# Altium PCB EC_meter_v2.PcbDoc
Units mm, origin at the board's own origin, x right, y up, seen from the top; angles counter-clockwise.
Board outline 61.09 x 32.64 mm, 2 copper layers (Top Layer, Bottom Layer); 34 components, 15 nets, 95 pads, 36 vias.
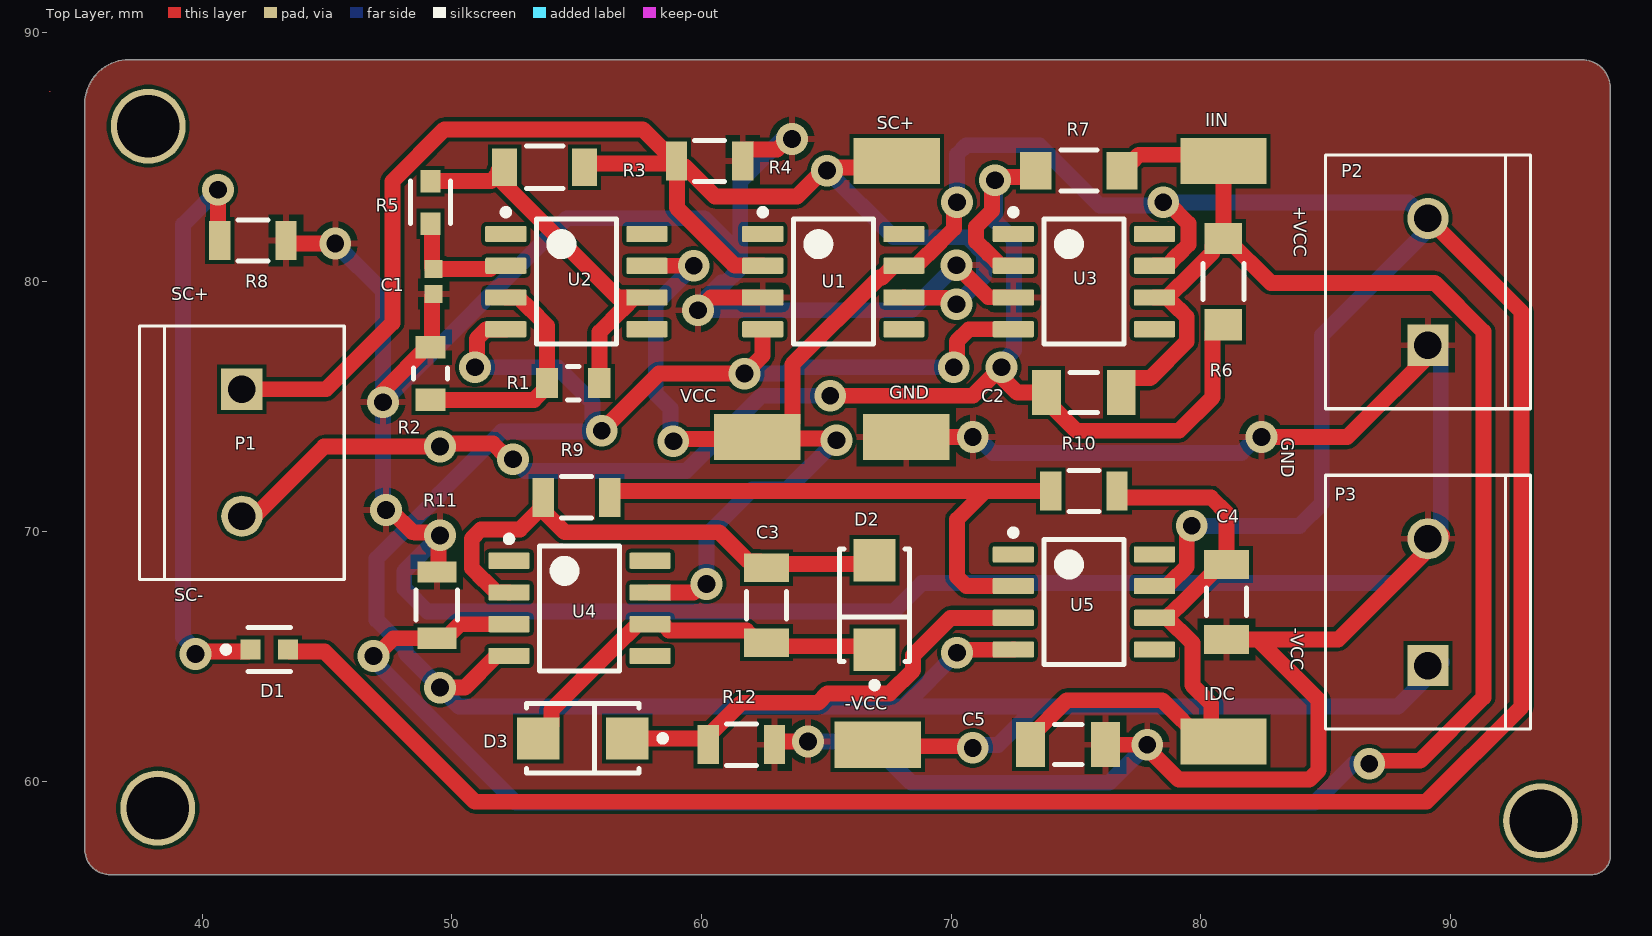
[diagram p0: Top Layer view]
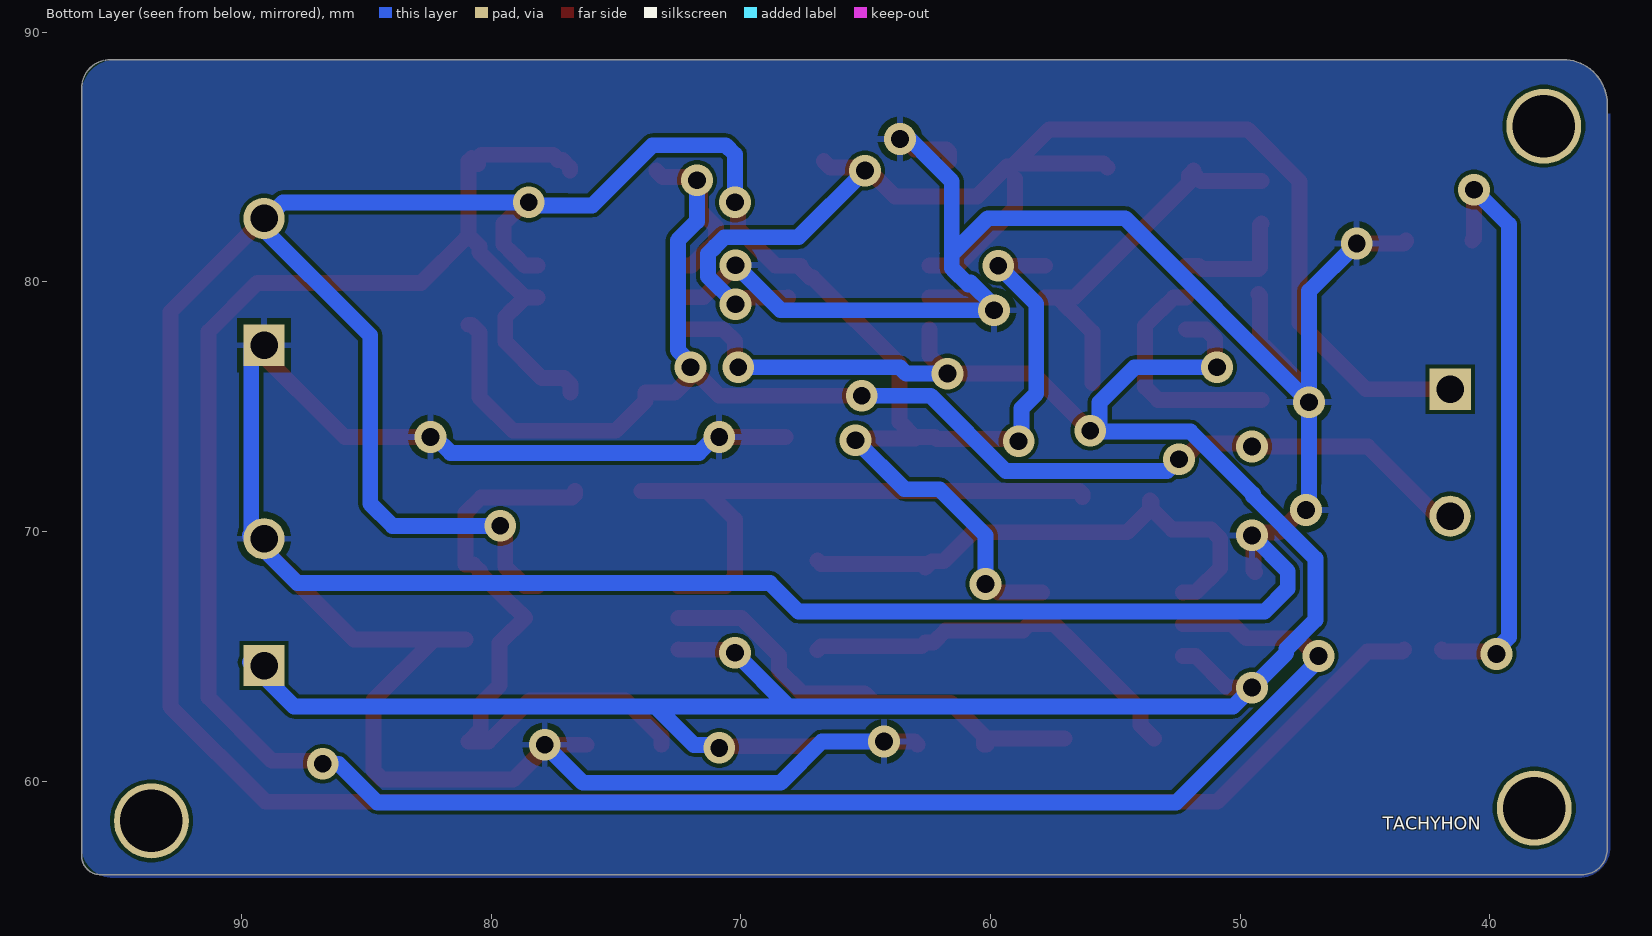
[diagram p1: Bottom Layer view, seen from below]
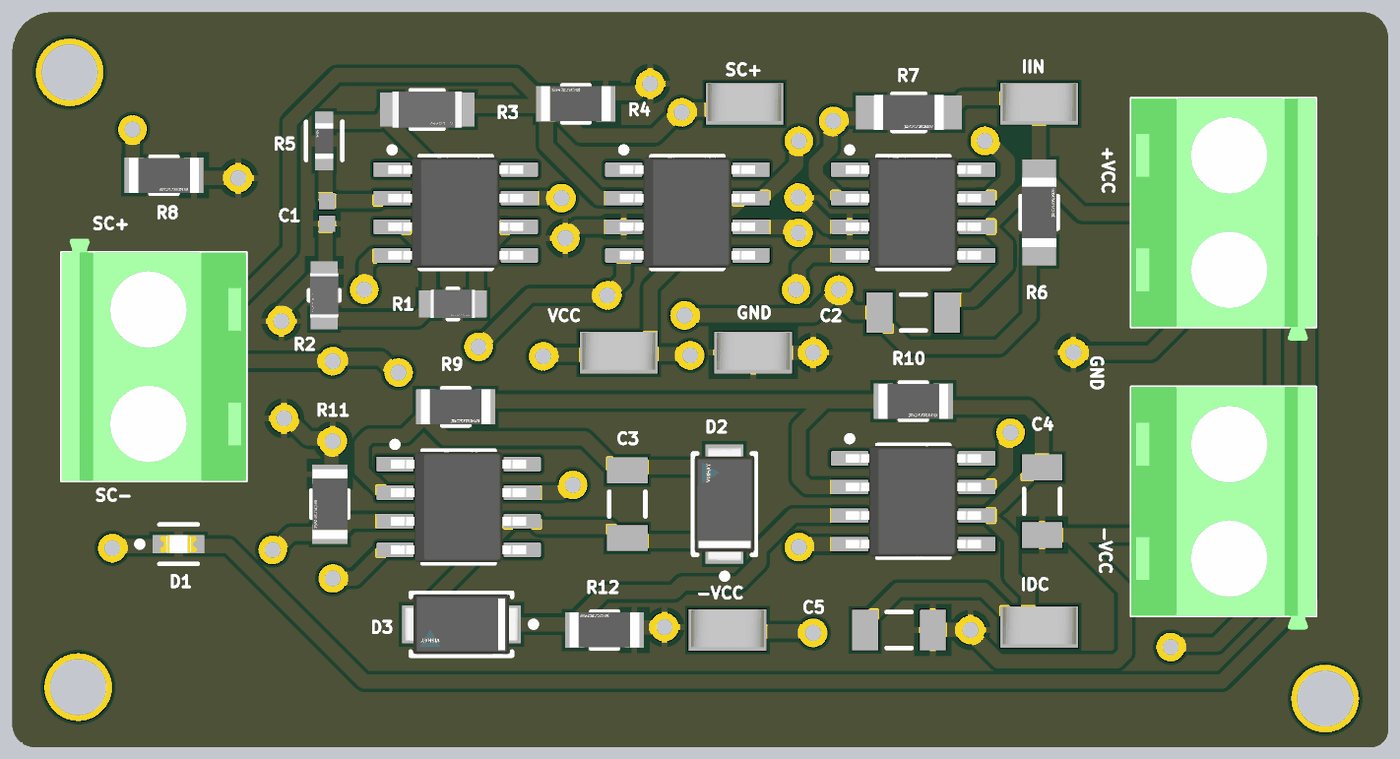
[diagram p2: 3D render of the assembled board from above, using the file's embedded part models]

## Layer stack, top to bottom
Top Solder: solder mask 0.0102, Solder Resist, Dk 3.5
Top Layer: signal copper 0.0356
Dielectric 1: dielectric 0.32, FR-4, Dk 4.8
Bottom Layer: signal copper 0.0356
Bottom Solder: solder mask 0.0102, Solder Resist, Dk 3.5

## Board outline
95.25,88.9 cw(c95.25,87.757) 96.393,87.757 96.393,57.023 cw(c95.631,57.023) 95.631,56.261 36.322,56.261 cw(c36.322,57.277) 35.306,57.277 35.306,87.122 cw(c37.084,87.122) 37.084,88.9

## Design rules (kind name [scope] priority, off if disabled: settings)
AssemblyTestPointUsage [All] p1: isadvanced=TRUE
AssemblyTestpoint [All] p1: isadvanced=TRUE testpointundercomponent=TRUE minsize=1.016 maxsize=2.54 preferedsize=1.524 minholesize=0 maxholesize=1.016 preferedholesize=0.813 testpointgrid=0.025 usegrid=TRUE gridtolerance=0 allowsidetop=TRUE allowsidebottom=TRUE
Clearance Clearnace [All] p1 off: isadvanced=TRUE gap=0.152 ignorepadtopadclearanceinfootprint=FALSE
Clearance Clearance_1 [OnMid vs OnMid] p2: gap=0.152 ignorepadtopadclearanceinfootprint=FALSE sourcerule=40 cellrowname=All cellrowtype=0 cellcolname=All cellcoltype=0 innerlayers=TRUE
Clearance Clearance_2 [(ExistsOnLayer('Top Layer') Or ExistsOnLayer('Bottom Layer')) vs (ExistsOnLayer('Top Layer') Or ExistsOnLayer('Bottom Layer'))] p3: gap=0.152 ignorepadtopadclearanceinfootprint=FALSE sourcerule=40 cellrowname=All cellrowtype=0 cellcolname=All cellcoltype=0 outerlayers=TRUE
Clearance [All] p4: gap=0.254 ignorepadtopadclearanceinfootprint=FALSE ismatrix=TRUE
ComponentClearance [All] p1: isadvanced=TRUE gap=0.254 collisioncheckmode=3 verticalgap=0.254 showdistances=FALSE
FabricationTestPointUsage [All] p1: isadvanced=TRUE valid=0 allowmultiple=FALSE
FabricationTestpoint [All] p1: isadvanced=TRUE side=3 testpointundercomponent=TRUE minsize=1.016 maxsize=2.54 preferedsize=1.524 minholesize=0 maxholesize=1.016 preferedholesize=0.813 testpointgrid=0.025 allowsidetop=TRUE allowsidebottom=TRUE usegrid=TRUE gridtolerance=0
FanoutControl Fanout_BGA [IsBGA] p1: isadvanced=TRUE bgadir=Out bgaviamode=Centered fanoutstyle=Auto fanoutdirection=Alternating viagrid=0.025 // Fanout_BGA (Default Rule)
FanoutControl Fanout_LCC [IsLCC] p2: isadvanced=TRUE bgadir=Out bgaviamode=Centered fanoutstyle=Auto fanoutdirection=Alternating viagrid=0.025 // Fanout_LCC (Default Rule)
FanoutControl Fanout_SOIC [IsSOIC] p3: isadvanced=TRUE bgadir=Out bgaviamode=Centered fanoutstyle=Auto fanoutdirection=Alternating viagrid=0.025 // Fanout_SOIC (Default Rule)
FanoutControl Fanout_Small [(CompPinCount < 5)] p4: isadvanced=TRUE bgadir=Out bgaviamode=Centered fanoutstyle=Auto fanoutdirection=OutThenIn viagrid=0.025 // Fanout_Small (Default Rule)
FanoutControl Fanout_Default [All] p5: isadvanced=TRUE bgadir=Out bgaviamode=Centered fanoutstyle=Auto fanoutdirection=Alternating viagrid=0.025 // Fanout_Default (Default Rule)
Height [All] p1: isadvanced=TRUE minheight=0 maxheight=25.4 prefheight=12.7
HoleSize [All] p1: isadvanced=TRUE absolutevalues=TRUE maxlimit=2.54 minlimit=0.025 maxpercent=80.000 minpercent=20.000
HoleToHoleClearance [All] p1: isadvanced=TRUE gap=0.254 allowstackedmicrovias=TRUE
LayerPairs [All] p1: isadvanced=TRUE enforce=TRUE
MinimumAnnularRing MinimumAnnularRing_1 [All] p1: isadvanced=TRUE minimumring=0.152
MinimumSolderMaskSliver [All] p1: isadvanced=TRUE minsoldermaskwidth=0.152
NetAntennae [All] p1: isadvanced=TRUE netantennaetolerance=0
PasteMaskExpansion [All] p1: isadvanced=TRUE expansion=0
PlaneClearance [All] p1: isadvanced=TRUE clearance=0.508
PlaneConnect [All] p1: isadvanced=TRUE planeconnectstyle=Relief reliefexpansion=0.508 reliefentries=4 reliefconductorwidth=0.254 reliefairgap=0.254
PolygonConnect [All] p1: connectstyle=Relief reliefconductorwidth=0.254 reliefentries=4 polygonreliefangle="90 Angle" airgapwidth=0.254
RoutingCorners [All] p1: isadvanced=TRUE cornerstyle=45-Degree minsetback=2.54 maxsetback=2.54
RoutingPriority [All] p1: isadvanced=TRUE routingpriority=0
RoutingVias [All] p1: holewidth=0.711 width=1.27 viastyle="Through Hole" minholewidth=0.711 minwidth=1.27 maxholewidth=0.711 maxwidth=1.27
ShortCircuit [All] p1: isadvanced=TRUE allowed=FALSE
SilkToSilkClearance [All] p1: isadvanced=TRUE silktosilkclearance=0.152
SilkToSolderMaskClearance [IsPad] p1: isadvanced=TRUE minsilkscreentomaskgap=0.152 clearancetoexposedcopper=TRUE
SolderMaskExpansion [All] p1: isadvanced=TRUE expansion=0.051 istentingtop=FALSE
SupplyNets "Schematic Supply Nets" [InNet('GND')] p1: isadvanced=TRUE voltage=0.000
UnRoutedNet [All] p1: isadvanced=TRUE
UnpouredPolygon [All] p1: isadvanced=TRUE
Width MaxMinWidth_1 [All] p1: isadvanced=TRUE maxlimit=5.08 minlimit=0.152 preferedwidth=0.254 minimp=50.000000 maximp=50.000000 favimp=50.000000
Width [All] p2 off: maxlimit=0.254 minlimit=0.254 preferedwidth=0.254
4 further rules are at their usual default settings.

## Classes and differential pairs
component class EC_meter_v2: -VCC C1 C2 C3 C4 C5 D2 D3 IDC IIN P1 P2 P3 R1 R2 R3 R4 R5 R6 R7 R9 R11 R12 SC+ U1 U2 U3 U4 U5 VCC

## Components (designator, comment, footprint, x,y, rotation, side; value= is the part's Value field where it differs from the comment)
-VCC "Test_Point" Test_point 67.183,61.341 r0 top (schematic designator *2)
C1 "CAP 10nF 16V 0402(1005)" CAPC0402(1005)60_M 49.276,80.01 r90 top value=10nF
C2 "CAP 1pF 100V 1206(3216)" CAPC1206(3216)170_N 75.311,75.565 r180 top value=1pF
C3 "CAP 1pF 100V 1206(3216)" CAPC1206(3216)170_N 62.611,67.056 r90 top value=1pF
C4 "CAP 1pF 100V 1206(3216)" CAPC1206(3216)170_N 81.026,67.183 r90 top value=1pF
C5 "CAP 1pF 100V 1206(3216)" CAPC1206(3216)170_N 74.676,61.468 r180 top value=1pF
D1 "LTST-C190KGKT" FP-LTST-C190KGKT-MFG 42.684,65.278 r0 top
D2 "S1M-E3/5AT" FP-95400-MFG 66.929,67.056 r90 top value=12pF
D3 "S1M-E3/5AT" FP-95400-MFG 55.245,61.722 r180 top value=12pF
GND "Test_Point" Test_point 68.326,73.66 r0 top (schematic designator *3)
IDC "Test_Point" Test_point 81.026,61.468 r0 top (schematic designator *6)
IIN "Test_Point" Test_point 81.026,84.709 r0 top (schematic designator *5)
P1 "TERMINAL_BLOCKS" "PCBComponent_1 - duplicate" 41.656,72.136 r270 top
P2 "TERMINAL_BLOCKS" "PCBComponent_1 - duplicate" 89.027,81.026 r90 top
P3 "TERMINAL_BLOCKS" "PCBComponent_1 - duplicate" 89.027,68.199 r90 top
R1 "AC0805FR-0710KL" FP-AC0805-MFG 54.864,75.946 r0 top value=10KΩ
R2 "AC0805FR-0710KL" FP-AC0805-MFG 49.149,76.327 r270 top value=10KΩ
R3 "AC1206FR-0724KL" FP-AC1206-MFG 53.721,84.582 r0 top value=24KΩ
R4 "CR1206-JW-102ELF" FP-CR1206-IPC_C 60.325,84.836 r180 top
R5 "RT0603BRD0730KL" FP-RT0603-0_55-MFG 49.149,83.185 r90 top
R6 "CR1206-FX-3300ELF" FP-CR1206-MFG 80.899,80.01 r90 top
R7 "CR1206-FX-3300ELF" FP-CR1206-MFG 75.11,84.455 r0 top
R8 "CR1206-JW-102ELF" FP-CR1206-IPC_C 42.037,81.661 r0 top
R9 "CR1206-JW-102ELF" FP-CR1206-IPC_C 54.991,71.374 r0 top
R10 "CR1206-JW-102ELF" FP-CR1206-IPC_C 75.311,71.628 r0 top
R11 "CR1206-JW-102ELF" FP-CR1206-IPC_C 49.403,67.056 r270 top
R12 "CR1206-JW-102ELF" FP-CR1206-IPC_C 61.595,61.468 r180 top
SC+ "Test_Point" Test_point 67.945,84.709 r0 top (schematic designator *1)
U1 "OPA343UA" D0008A_M 65.278,80.01 r0 top
U2 "OPA343UA" D0008A_M 54.991,80.01 r0 top
U3 "OPA343UA" D0008A_M 75.311,80.01 r0 top
U4 "OPA343UA" D0008A_M 55.118,66.929 r0 top
U5 "OPA343UA" D0008A_M 75.311,67.183 r0 top
VCC "Test_Point" Test_point 62.357,73.66 r0 top (schematic designator *4)

## Footprints (in the part's own frame and the unit in brackets; to place one, negate y for a bottom-side part, rotate by r counter-clockwise, add the part's x,y. Pads: shape width x height; smd on the part's side, far side on the other; paste and mask are expansions set on the pad)
CAPC0402(1005)60_M [mm] "Chip Capacitor, Body 1.0x0.5mm, Height 0.6mm, IPC Low Density"
  rect 0.72x0.72 smd: 1(-0.5,0) 2(0.5,0)
  body extent -0.55,-0.3 0.55,0.3, height 0.6
CAPC1206(3216)170_N [mm] "Chip Capacitor, Body 3.2x1.6mm, Height 1.7mm, IPC Medium Density"
  rect 1.15x1.8 smd: 1(-1.5,0) 2(1.5,0)
  silkscreen extent -0.55,-0.8 0.55,0.8, body extent -1.7,-0.9 1.7,0.9, height 1.7
D0008A_M [mm] "SOIC, 8-Leads, Body 5x4mm, Pitch 1.27mm, IPC Low Density"
  rrect15% 1.65x0.65 smd: 1(-2.825,1.905) 2(-2.825,0.635) 3(-2.825,-0.635) 4(-2.825,-1.905) 5(2.825,-1.905) 6(2.825,-0.635) 7(2.825,0.635) 8(2.825,1.905)
  silkscreen extent -2.95,-2.5 1.6,2.9, body extent -3,-2.45 3,2.45, height 1.63
FP-95400-MFG [mm]
  rect 1.7x1.68 smd paste+0 mask+0: 1(-1.79,0) 2(1.79,0)
  silkscreen extent -3.32,-1.4 2.25,1.4, body extent -2.74,-1.5 2.74,1.5, height 0.25
FP-AC0805-MFG [mm]
  rect 0.9x1.2 smd paste+0 mask+0: 1(-1.05,0) 2(1.05,0)
  silkscreen extent -0.23,-0.67 0.23,0.67, body extent -1.6,-0.77 1.6,0.77, height 0.25
FP-AC1206-MFG [mm]
  rect 1x1.5 smd paste+0 mask+0: 1(-1.6,0) 2(1.6,0)
  silkscreen extent -0.72,-0.85 0.72,0.85, body extent -2.2,-0.95 2.2,0.95, height 0.25
FP-CR1206-IPC_C [mil]
  rect 33.79x61.5 smd paste+0 mask+0: 1(-52.24,0) 2(52.24,0)
  silkscreen extent -24,-32 24,32, body extent -73,-36 73,36, height 10
FP-CR1206-MFG [mm]
  rect 1.25x1.5 smd paste+0 mask+0: 1(-1.725,0) 2(1.725,0)
  silkscreen extent -0.72,-0.82 0.72,0.82, body extent -2.45,-0.92 2.45,0.92, height 0.25
FP-LTST-C190KGKT-MFG [mm]
  rect 0.8x0.8 smd paste+0 mask+0: 1(-0.75,0) 2(0.75,0)
  silkscreen extent -1.85,-0.87 0.85,0.87, body extent -1.25,-0.55 1.25,0.55, height 0.25
FP-RT0603-0_55-MFG [mm]
  rect 0.9x0.8 smd paste+0 mask+0: 1(-0.85,0) 2(0.85,0)
  silkscreen extent -0.85,-0.81 0.86,0.8, body extent -1.4,-0.55 1.4,0.55, height 0.25
"PCBComponent_1 - duplicate" [mm]
  rect 1.65x1.65 / inner round 1.65 / far side rect 1.65x1.65 hole 1.1: 1(-3.563,-0.061)
  round 1.65 hole 1.1: 2(1.517,-0.061)
  silkscreen extent -6.1,-4.16 4.06,4.04, body extent -6.7,-4.16 4.06,4.04, height 10
Test_point [mm]
  rect 3.45x1.85 smd: 1(-0.127,0.127)
  body extent -1.75,-0.64 1.5,1.01, height 2.05

## Part data
C1: library part CMP-1034-01878-1, "CAP 10nF 16V -20% to +80% 0402 (1005 Metric) Thickness 0.6mm SMD", Case-EIA=0402, Case-Metric=1005, Rated Voltage="16 V", Tolerance="-20% to +80%", Max Thickness="0.6 mm", Technology=SMT
C2 C3 C4 C5: library part CMP-1037-00028-1, "CAP 1pF 100V ±0.25pF 1206 (3216 Metric) Thickness 1.7mm SMD", Case-EIA=1206, Case-Metric=3216, Rated Voltage="100 V", Tolerance=Â±0.25pF, Max Thickness="1.7 mm", Technology=SMT
D1: library part CMP-2000-05197-2, "LED GREEN CLEAR CHIP SMD", Case Code (Imperial)=0603, Case Code (Metric)=1608, Color=Green, Forward Current=30mA, Forward Voltage=2V, Lens Color=Colorless, Max Operating Temperature=85°C, Min Operating Temperature=-55°C, Package Quantity=1, Power Dissipation=75mW, Reverse Voltage=5V, Test Current=20mA, Case/Package=0603, Depth=0.8mm, Dominant Wavelength=571nm, Height=0.8mm, Illumination Color=Green, Lead Free="Lead Free", Length=1.6mm, Lens Style=Diffused, Lens Transparency=Clear, Luminous Intensity=35mcd, Mount="Surface Mount", Number of Elements=1, Number of LEDs=1, Number of Pins=2, Packaging="Tape and Reel", Power Rating=75mW, Radiation Hardening=No, Viewing Angle=130°, Wavelength=574nm, Width=0.8mm
D2 D3: library part CMP-02540-000018-1, "DIODE GEN PURP 1KV 1A DO214AC", Capacitance=12pF, Forward Current=1A, Manufacturer=Vishay, Max Junction Temp=+150°C, Max Repetitive Reverse Voltage=1000V, Max Surge Forward Current=30A, Package=95400, Peak Reverse Current=5uA, Temperature="-55°C to +150°C", Temperature Range Low=-55°C, Automotive=No, Category=Diode, ComponentLink2Description=Datasheet, ComponentLink2URL=http://www.vishay.com/docs/88711/s1.pdf, Device Class L1="Discrete Semiconductors", Device Class L2=Diodes, Device Class L3="Rectifier Diodes", Digikey Description="DIODE GEN PURP 1KV 1A DO214AC", Footprint Url=http://www.vishay.com/docs/95400/sma.pdf, Height=2.29mm, Lead Free=Yes, Manufacturer Part Number=S1M-E3/5AT, Mouser Description="Rectifiers 1.0 Amp 1000 Volt 30A IFSM @ 8.3ms", Octopart=https://octopart.com/s1m-e3%2F5at-vishay-42334588, RoHS=TRUE, Standoff Height=0mm, Temperature Range High=+150°C
R1 R2: library part CMP-2001-04480-2, "RES SMD 10K OHM 1% 1/8W 0805", Manufacturer=Yageo, Package=AC0805, Power Rating=1/8W, Resistance=10KΩ, Temperature="-55°C to +155°C", Temperature Range High=+155°C, Temperature Range Low=-55°C, Tolerance=0.01, Voltage Rating=150V, Automotive=Yes, Automotive Grade="Grade 0", Category=Res, ComponentLink2Description=Datasheet, ComponentLink2URL=http://www.yageo.com/documents/recent/PYu-AC_51_RoHS_L_6.pdf, Composition="Thick Film", Device Class L1="Passive Components", Device Class L2=Resistors, Device Class L3="Chip SMD Resistors", Digikey Description="RES SMD 10K OHM 1% 1/8W 0805", Footprint Url=http://www.yageo.com/exep/pages/download/literatures/PYu-R_Mount_10.pdf, Height=0.6mm, Ipc Land Pattern Name=RESC200125X50, Lead Free=Yes, Manufacturer Part Number=AC0805FR-0710KL, Mouser Description="Res Thick Film 0805 10K Ohm 1% 0.125W(1/8W) ±100ppm/C Epoxy Pad SMD Automotive T/R", Octopart=https://octopart.com/ac0805fr-0710kl-yageo-21711112, RoHS=TRUE, Series=AC
R3: library part CMP-03412-000204-1, "RES SMD 24K OHM 1% 1/4W 1206", Manufacturer=Yageo, Package=AC1206, Power Rating=0.25W, Resistance=24KΩ, Temperature="-55°C to +155°C", Temperature Range High=+155°C, Temperature Range Low=-55°C, Tolerance=0.01, Voltage Rating=200V, Automotive=Yes, Automotive Grade="Grade 0", Category=Res, ComponentLink2Description=Datasheet, ComponentLink2URL=http://www.yageo.com/NewPortal/yageodocoutput?fileName=/pdf/R-Chip/PYu-AC_51_RoHS_L_6.pdf, Composition="Thick Film", Device Class L1="Passive Components", Device Class L2=Resistors, Device Class L3="Chip SMD Resistors", Digikey Description="RES SMD 24K OHM 1% 1/4W 1206", Footprint Url=http://www.yageo.com/exep/pages/download/literatures/PYu-R_Mount_10.pdf, Height=0.65mm, Ipc Land Pattern Name=RESC310160X55, Lead Free=Yes, Manufacturer Part Number=AC1206FR-0724KL, Mouser Description="RES SMD 24K OHM 1% 1/4W 1206", Octopart=https://octopart.com/ac1206fr-0724kl-yageo-30511081, RoHS=TRUE, Series=AC
R4 R8 R9 R10 R11 R12: library part CMP-07231-001820-1, "Thick Film Chip Resistors 1206 1kΩ 0.25W 5% 200ppm/°C", Case Code (Imperial)=1206, Case Code (Metric)=3216, Max Operating Temperature=155°C, Min Operating Temperature=-55°C, Package Quantity=5000, Power Rating=250mW, Resistance=1kR, Temperature Coefficient=200ppm/°C, Tolerance=5%, Voltage Rating=200V, Case/Package=1206, Composition="Thick Film", Contact Plating=Tin, Depth=1.6mm, Height=0.6mm, Length=3.2mm, Military Standard=Not, Mount="Surface Mount", Number of Pins=2, Packaging="Tape and Reel", Radiation Hardening=No, REACH SVHC="No SVHC", Termination=SMD/SMT, Thickness=610um, Voltage Rating (DC)=200V, Width=1.6mm
R5: library part CMP-2000-04435-3, Case Code (Imperial)=0603, Case Code (Metric)=1608, Max Operating Temperature=125°C, Max Power Dissipation=100mW, Min Operating Temperature=-55°C, Resistance=30kΩ, Temperature Coefficient=25ppm/°C, Tolerance=0.1%, Voltage Rating=75V, Voltage Rating (DC)=50V, Case/Package=0603, Composition="Thin Film", Contact Plating=Tin, Depth=800µm, Features="Moisture Resistant", Height=550µm, Lead Free="Lead Free", Length=1.6mm, Military Standard=Not, NexarPartId=1243756, Number of Terminations=2, Power Rating=100mW, Radiation Hardening=No, RoHS=Compliant, Schedule B="8533210045, 8533210045", Termination=SMD/SMT, Weight=2.012816mg, Width=787.4µm
R6 R7: library part CMP-07231-003158-1, "Thick Film Chip Resistors 1206 330Ω 0.25W 1% 100ppm/°C", Case Code (Imperial)=1206, Case Code (Metric)=3216, Max Operating Temperature=155°C, Max Power Dissipation=250mW, Min Operating Temperature=-55°C, Package Quantity=5000, Resistance=330R, Temperature Coefficient=100ppm/°C, Tolerance=1%, Voltage Rating=200V, Case/Package=1206, Composition="Thick Film", Contact Plating=Tin, Depth=1.6mm, Height=0.6mm, Length=3.2mm, Military Standard=Not, Mount="Surface Mount", Number of Pins=2, Number of Terminations=2, Packaging="Tape and Reel", Power Rating=250mW, Radiation Hardening=No, REACH SVHC="No SVHC", Termination=SMD/SMT, Thickness=610um, Voltage Rating (DC)=200V, Width=1.6mm
U1 U2 U3 U4 U5: library part CMP-0272-00349-3, "Single-Supply, Rail-to-Rail Operational Amplifier MicroAmplifier(TM) Series, 2.5 to 5.5 V, -40 to 85 degC, 8-pin SOIC (D8), Green (RoHS & no Sb/Br)", Manufacturer="Texas Instruments", Rating=Catalog, Total Supply Voltage(Max)(+5V is 5, +/-5V is 10)=5.5, Total Supply Voltage(Min)(+5V is 5, +/-5V is 10)=2.5, CMRR(Min)(dB)=74, Code_JEDEC=MS-012, ComponentLink1Description="Manufacturer URL", ComponentLink1URL=http://www.ti.com/, ComponentLink2Description=Datasheet, ComponentLink2URL=http://www.ti.com/lit/ds/symlink/opa343.pdf, ComponentLink3Description="Package Specification", ComponentLink3URL=http://www.ti.com/litv/pdf/msoi002j, DatasheetVersion=SBOS090A, Eco-Plan="Green (RoHS & no Sb/Br)", GBW(Typ)(MHz)=5.5, IIB(Max)(pA)=10, Iq per channel(Max)(mA)=1.25, Mounting Technology="Surface Mount", Number of Channels=1, Offset Drift(Typ)(uV/C)=3, PackageDescription="8-Pin Plastic Small Outline, Body 4.9 x 3.9 mm, Pitch 1.27 mm", PackageReference=D0008A, PackageVersion="4040047-3/M, 06/2011", Packing=TUBE, PartNumber=OPA343UA, Slew Rate(Typ)(V/us)=6, Sub Family="High Output Current Amplifier (>=50mA), Low Input Bias Current Amp (<=10pA), Low Supply Voltage Amplifier (<=2.7V), Precision Amplifier", Vio (25C)(Max)(mV)=8

## Free pads (board coordinates)
  round 3 hole 2.5: 2(37.846,86.233) 4(93.599,58.42) 5(38.227,58.928)

## Via types
v1: diameter 1.27, hole 0.711, Top Layer to Bottom Layer, 36 vias

## Nets (pads, with @x,y where several pads share a name; then routed paths per layer and width w, separated by ;. In a path a pad name is that pad's centre, name@x,y a point inside that pad or via, vN(x,y) a via of type N, cw(c..) or ccw(c..) an arc to the next point about the centre after c; other vN are vias at no path point)
-VCC: -VCC.1 P3.1 U1.4 U2.4 U3.4 U4.4 U5.4 | length 104.1
  Top Layer w0.635: v1(49.53,63.754) 50.523,63.754 51.793,65.024 U4.4 ; v1(50.927,76.581) 51.005,76.659 51.005,77.726 51.377,78.097 52.158,78.097 U2.4 ; v1(56.007,74.041) 58.293,76.327 v1(61.722,76.327) 62.445,77.05 62.445,78.097 U1.4 ; -VCC.1 67.12,61.404 70.802,61.404 v1(70.866,61.341) ; v1(70.104,76.581) 70.226,76.703 70.226,77.622 70.708,78.105 U3.4 ; v1(70.231,65.151) 70.35,65.27 72.478,65.27 U5.4
  Bottom Layer w0.635: v1(50.927,76.581) 54.229,76.581 55.631,75.179 v1@55.631,74.003 ; v1(56.007,74.041) 55.969,74.003 v1@55.631,74.003 ; v1(61.722,76.327) 63.373,76.327 63.627,76.581 v1(70.104,76.581) ; v1(70.231,65.151) 68.072,62.992 ; v1(70.866,61.341) 70.988,61.463 71.877,61.463 73.406,62.992 ; P3.1@89.662,64.77 87.884,62.992 73.406,62.992 ; v1@55.631,74.003 51.993,74.003 49.492,71.501 49.492,71.424 46.99,68.922 46.99,66.46 48.156,65.293 48.156,65.128 50.292,62.992 68.072,62.992 ; 68.072,62.992 73.406,62.992
FB_OSC: C1.2 R5.1 U2.2 | length 4.8
  Top Layer w0.635: R5.1 49.212,82.271 49.212,80.574 C1.2 51.531,80.51 51.666,80.645 U2.2
GND: C1.1 C4.1 C5.1 GND.1 P2.1 P3.2 R2.1 R4.1 R8.2 R11.1 R12.1 U1.3 U3.3 | length 188
  Top Layer w0.635: R8.2 ccw(c43.491,81.661) 43.491,81.534 v1(45.339,81.534) ; v1(47.244,75.184) 47.244,75.622 49.063,77.441 49.212,77.441 49.212,79.447 C1.1 ; v1(47.371,70.866) 47.543,70.866 48.432,69.977 48.514,69.977 48.519,69.972 49.408,69.972 v1(49.53,69.85) 49.466,69.787 49.466,68.446 R11.1 ; v1(59.862,78.867) 60.37,79.375 U1.3 ; R4.1 61.652,85.188 61.764,85.3 63.03,85.3 63.455,85.725 v1(63.627,85.725) ; R12.1 62.922,61.483 63.034,61.595 v1(64.262,61.595) ; GND.1 v1(70.866,73.787) ; v1(70.206,80.67) 71.494,79.383 72.478,79.383 U3.3 ; C5.1 v1(77.851,61.468) 77.851,61.328 79.108,60.071 84.337,60.071 84.709,60.443 84.709,63.246 82.272,65.683 ; C4.1 82.272,65.683 ; v1(82.423,73.787) 85.852,73.787 P2.1@89.535,77.47 ; P3.2@89.662,69.85 85.495,65.683 82.272,65.683
  Bottom Layer w0.635: v1(45.339,81.534) 47.244,79.629 v1(47.244,75.184) ; v1(47.371,70.866) 47.249,70.988 47.249,71.9 47.244,71.905 v1(47.244,75.184) ; v1(49.53,69.85) 48.095,68.415 48.095,67.729 49.022,66.802 67.691,66.802 68.834,67.945 87.757,67.945 89.662,69.85 89.599,69.913 89.599,77.406 P2.1@89.535,77.47 ; 61.506,80.511 60.881,79.886 60.795,79.972 59.862,79.039 v1(59.862,78.867) 68.404,78.867 v1(70.206,80.67) ; 61.551,80.556 61.551,81.109 60.11,82.55 54.61,82.55 v1(47.244,75.184) ; 61.551,81.199 61.551,84.03 62.026,84.505 v1@63.5,85.979 ; v1(64.262,61.595) 66.755,61.595 68.406,59.944 76.327,59.944 v1(77.851,61.468) ; v1(70.866,73.787) 71.038,73.787 71.673,73.152 81.616,73.152 82.251,73.787 v1(82.423,73.787)
IDC: C4.2 C5.2 IDC.1 R10.2 U5.6 | length 25.5
  Top Layer w0.635: C5.2 73.176,61.793 74.629,63.246 78.448,63.246 80.099,61.595 IDC.1 80.409,62.085 80.409,63.101 79.656,63.854 79.656,65.544 79.127,66.073 79.111,66.073 78.636,66.548 79.093,67.005 79.108,67.005 80.443,68.34 80.443,68.425 80.701,68.683 C4.2 81.026,70.739 80.401,71.364 76.75,71.364 76.638,71.476 R10.2
IIN: C2.1 IIN.1 R6.2 R7.2 R11.2 U3.6 U4.3 | length 99
  Top Layer w0.635: v1(46.863,65.024) 46.964,65.024 47.669,65.729 49.755,65.729 50.32,66.294 U4.3 ; C2.1 76.811,75.89 77.068,76.147 77.964,76.147 79.431,77.614 79.431,78.596 79.108,78.918 79.093,78.918 78.636,79.375 U3.6 ; R7.2 76.835,84.58 77.143,84.888 77.312,84.888 77.514,85.09 80.391,85.09 IIN.1@80.772,84.709 ; U3.6@78.636,79.383 78.643,79.383 79.111,79.85 79.127,79.85 80.466,81.189 80.466,81.427 80.774,81.735 R6.2 ; IIN.1@80.518,84.709 80.772,84.963 IIN.1 R6.2 ; v1(86.741,60.706) 86.863,60.828 88.777,60.828 91.313,63.364 91.313,78.007 89.361,79.959 82.8,79.959 81.024,81.735 R6.2
  Bottom Layer w0.635: v1(46.863,65.024) 46.863,64.858 52.565,59.157 84.557,59.157 86.106,60.706 v1(86.741,60.706)
NetC3_1: C3.1 D2.1 D3.2 U4.6 | length 16.2
  Top Layer w0.635: D3.2 53.465,61.722 53.988,62.245 53.988,62.854 56.971,65.837 56.986,65.837 57.443,66.294 58.443,66.294 58.697,66.04 61.802,66.04 62.286,65.556 C3.1 62.756,65.411 66.784,65.411 D2.1
NetD1_1: D1.1 R8.1 | length 23.7
  Top Layer w0.635: v1(39.74,65.101) 39.835,65.195 41.851,65.195 D1.1 ; v1(40.64,83.693) 40.64,81.731 R8.1
  Bottom Layer w0.635: v1(39.74,65.101) 39.74,65.273 39.243,65.77 39.243,82.296 v1(40.64,83.693)
NetD3_1: D3.1 R12.2 U5.3 | length 18.2
  Top Layer w0.635: D3.1 60.156,61.722 R12.2@60.156,61.468 ; R12.2 60.268,61.82 61.598,63.15 64.67,63.15 65.042,63.522 67.539,63.522 68.473,64.455 68.473,65.044 69.977,66.548 U5.3
NetR1_2: R1.2 R3.1 R5.2 U2.6 | length 15.2
  Top Layer w0.635: R5.2 51.57,84.035 51.867,84.332 51.867,84.455 52.05,84.272 52.05,83.967 56.634,79.383 U2.6@57.316,79.383 ; R1.2 55.914,77.989 56.825,78.9 56.841,78.9 57.316,79.375 U2.6
NetR9_2: R9.2 R10.1 U5.2 | length 24.2
  Top Layer w0.635: R9.2 56.318,71.516 56.43,71.628 71.374,71.628 ; U5.2 70.612,67.818 70.231,68.199 70.231,70.485 71.374,71.628 ; R10.1 71.374,71.628
NON_I_U2: R1.1 R2.2 U2.3 | length 9.4
  Top Layer w0.635: R2.2 53.295,75.277 53.814,75.796 R1.1 53.814,78.243 53.138,78.918 53.123,78.918 52.666,79.375 U2.3
NON_I_U4: C3.2 D2.2 R9.1 U4.2 | length 21.4
  Top Layer w0.635: U4.2 52.285,67.572 51.785,67.572 51.318,68.039 51.302,68.039 50.8,68.541 50.8,69.717 51.172,70.089 52.731,70.089 53.552,70.91 53.552,71.192 53.607,71.247 53.607,70.895 54.525,69.977 60.706,69.977 61.87,68.813 62.353,68.813 62.538,68.628 C3.2 ; C3.2@62.611,68.701 66.784,68.701 D2.2
SC+: P1.1 R3.2 R4.2 SC+.1 U1.2 U1.6 | length 55.5
  Top Layer w0.635: P1.1@42.103,75.699 44.965,75.699 47.625,78.359 47.625,84.026 49.705,86.106 57.645,86.106 59.125,84.626 59.335,84.626 60.547,83.414 63.82,83.414 64.861,84.455 v1(65.024,84.455) 65.146,84.577 66.416,84.577 SC+.1@66.675,84.836 ; R3.2 55.477,84.738 R4.2@58.886,84.738 ; R4.2@59.013,84.118 59.013,82.973 61.334,80.653 62.445,80.653 U1.2 ; U1.6 68.11,79.367 69.774,79.367 70.04,79.102 v1(70.212,79.102)
  Bottom Layer w0.635: v1(65.024,84.455) 67.691,81.788 70.652,81.788 71.024,81.416 71.024,81.414 71.311,81.127 71.311,80.212 70.212,79.113 v1(70.212,79.102)
SC-: C2.2 P1.2 R6.1 R7.1 U3.2 | length 61.6
  Top Layer w0.635: P1.2@42.103,70.619 44.89,73.406 v1(49.53,73.406) 49.652,73.528 51.65,73.528 52.158,73.02 52.329,73.02 v1(52.451,72.898) ; v1(65.151,75.438) 70.866,75.438 v1(72.009,76.581) 72.009,76.2 72.644,75.565 C2.2 73.811,75.24 75.01,74.041 79.121,74.041 80.466,75.386 80.466,77.977 80.774,78.285 R6.1 ; v1(71.755,84.074) v1@71.877,84.196 ; U3.2 72.478,80.653 71.978,80.653 71.511,81.12 71.495,81.12 70.993,81.622 70.993,82.208 71.633,82.848 71.633,83.952 v1@71.877,84.196 ; R7.1 73.126,84.196 v1@71.877,84.196
  Bottom Layer w0.635: v1(52.451,72.898) 52.921,72.428 59.386,72.428 62.396,75.438 v1(65.151,75.438) ; v1(71.755,84.074) 71.755,82.423 72.517,81.661 72.517,77.261 72.009,76.753 v1(72.009,76.581)
VCC: D1.2 P2.2 U1.7 U2.7 U3.7 U4.7 U5.7 VCC.1 | length 164.1
  Top Layer w0.635: D1.2 43.517,65.195 44.914,65.195 50.927,59.182 89.027,59.182 92.837,62.992 92.837,78.795 P2.2 ; U2.7 v1(59.69,80.645) ; U4.7 59.683,67.564 60.026,67.907 v1(60.198,67.907) ; v1(58.874,73.622) 58.957,73.704 62.147,73.704 VCC.1 63.03,73.787 63.638,74.394 63.638,76.695 67.112,80.17 67.224,80.17 67.595,80.542 67.595,80.637 67.603,80.645 68.603,80.645 69.078,81.12 69.094,81.12 70.109,82.136 70.109,83.063 v1(70.231,83.185) ; VCC.1@63.03,73.724 65.341,73.724 v1(65.405,73.66) ; U5.7 78.636,67.818 79.093,68.275 79.108,68.275 79.431,68.597 79.431,70.033 v1(79.629,70.231) ; U3.7 78.143,80.653 78.643,80.653 79.093,81.102 79.108,81.102 79.502,81.495 79.502,82.335 78.652,83.185 v1(78.486,83.185)
  Bottom Layer w0.635: v1(58.874,73.622) 58.753,73.743 58.753,74.94 58.166,75.527 58.166,79.121 v1(59.69,80.645) ; v1(60.198,67.907) 60.198,69.85 62.042,71.694 63.439,71.694 v1(65.405,73.66) ; v1(70.231,83.185) 70.231,85.099 70.603,85.471 73.533,85.471 75.946,83.058 76.917,83.058 76.923,83.063 78.364,83.063 v1(78.486,83.185) 88.33,83.185 88.771,82.744 89.341,82.744 89.535,82.55 84.836,77.851 84.836,71.12 83.947,70.231 v1(79.629,70.231)
pads on no net: U1.1 U1.5 U1.8 U2.1 U2.5 U2.8 U3.1 U3.5 U3.8 U4.1 U4.5 U4.8 U5.1 U5.5 U5.8

## Polygon pours and split planes (outlines as drawn)
GND on Top Layer "GND_1" (solid, remove dead copper, pour order 5): 35.306,87.122 cw(c37.084,87.122) 37.084,88.9 95.25,88.9 cw(c95.25,87.757) 96.393,87.757 96.393,57.023 cw(c95.631,57.023) 95.631,56.261 36.322,56.261 cw(c36.322,57.277) 35.306,57.277 35.306,86.741
no net on Top Layer "GND " (solid, remove dead copper, pour order 1): 33.909,87.63 33.909,87.62
GND on Bottom Layer "GND" (solid, remove dead copper, pour order 0): 35.179,86.741 35.179,57.404 ccw(c36.449,57.404) 36.449,56.134 95.123,56.134 ccw(c95.123,57.404) 96.393,57.404 96.393,87.503 ccw(c94.996,87.503) 94.996,88.9 37.084,88.9 ccw(c37.084,87.122) 35.306,87.122 35.306,86.741

## Silkscreen, mask and mechanical layers (free items; w line width, h text height)
Top Overlay:
  text "+VCC" at 83.718,83.033 h0.51 r270
  text "SC+" at 38.76,79.273 h0.51
  text "GND" at 83.21,73.762 h0.51 r270
  text "SC-" at 38.887,67.208 h0.51
  text "-VCC" at 83.591,66.142 h0.51 r270
Bottom Overlay:
  text "TACHYHON" at 44.298,58.064 h0.51
Mechanical 1:
  lines w0.254: 35.179,57.404 ccw(c36.449,57.404) 36.449,56.134 94.488,56.134 95.123,56.134 ccw(c95.123,57.404) 96.393,57.404 96.393,87.503 96.393,87.63 ccw(c95.123,87.63) 95.123,88.9 36.068,88.9 ccw(c36.068,88.011) 35.179,88.011 35.179,85.598 35.179,58.928 35.179,57.404